# Altium PCB PCB - LAYOUT.PcbDoc
Units mm, origin at the board's own origin, x right, y up, seen from the top; angles counter-clockwise.
Board outline 61.25 x 57.25 mm, 2 copper layers (Top Layer(SNG), Bottom Layer(SNG)), stack 1.135 mm thick; 67 components, 44 nets, 237 pads, 203 vias.
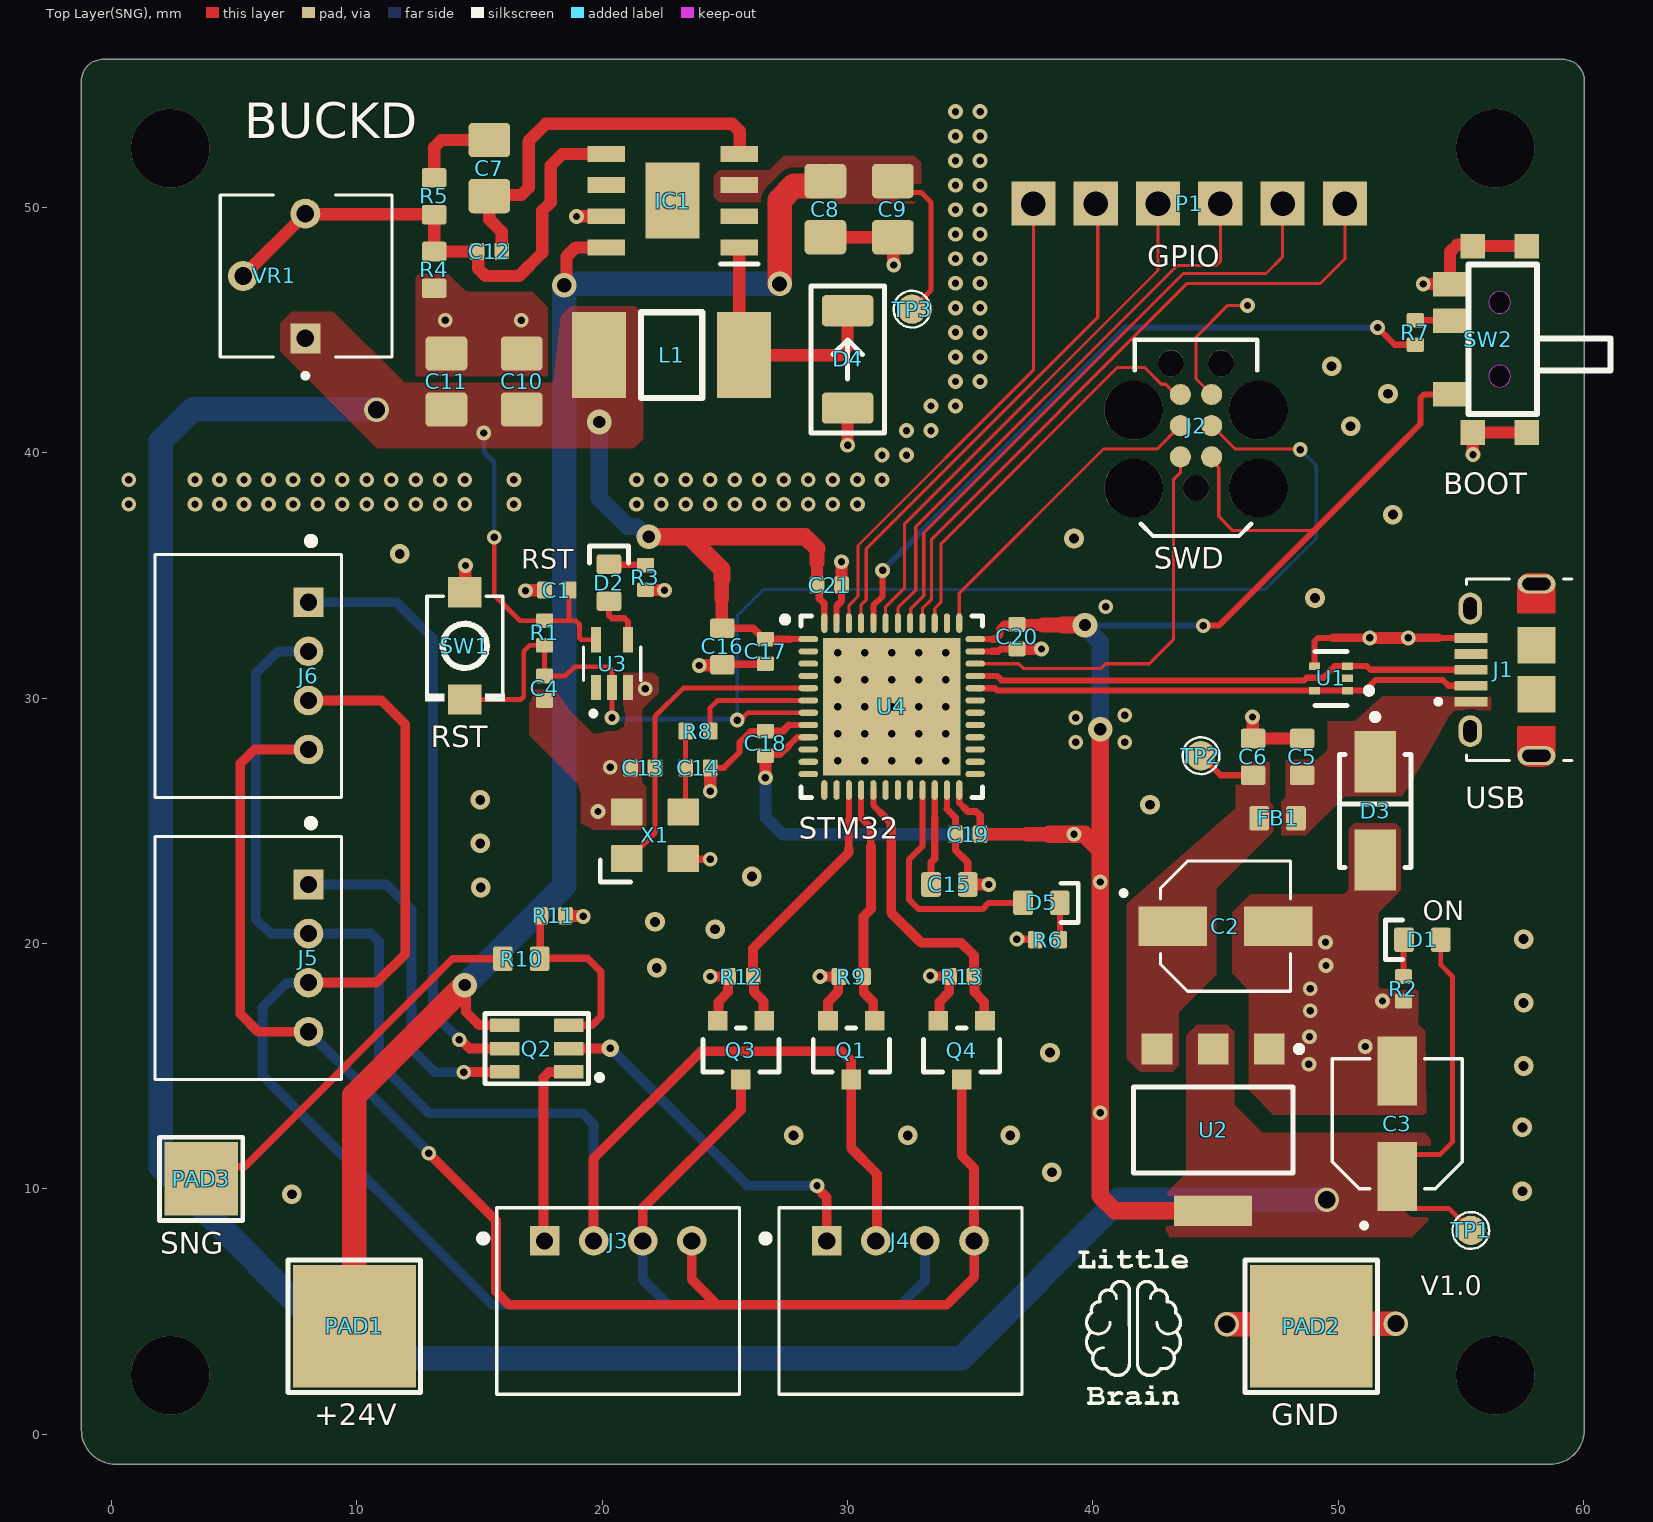
[diagram p0: Top Layer(SNG) view]
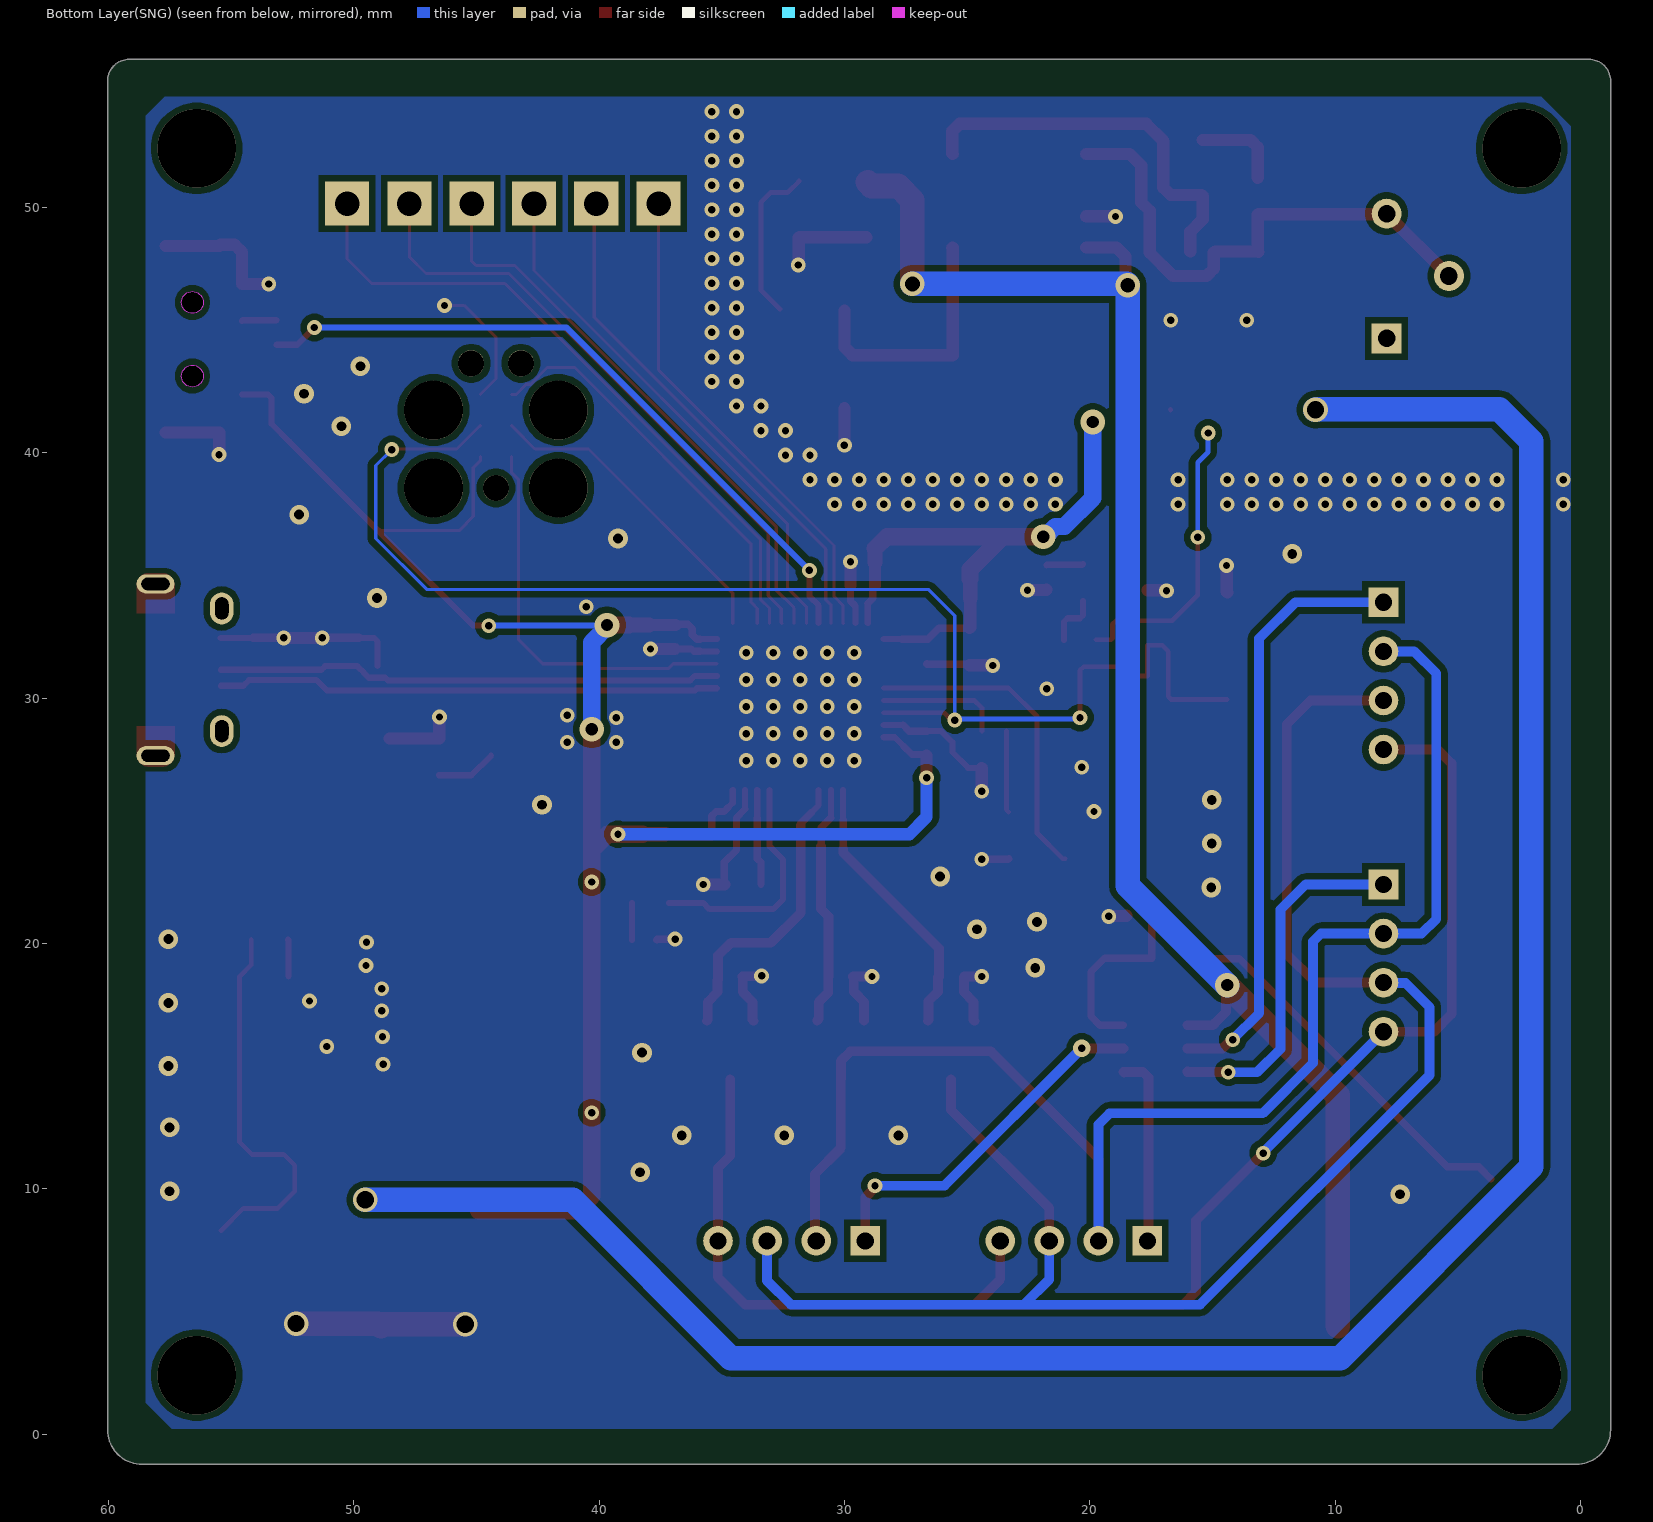
[diagram p1: Bottom Layer(SNG) view, seen from below]
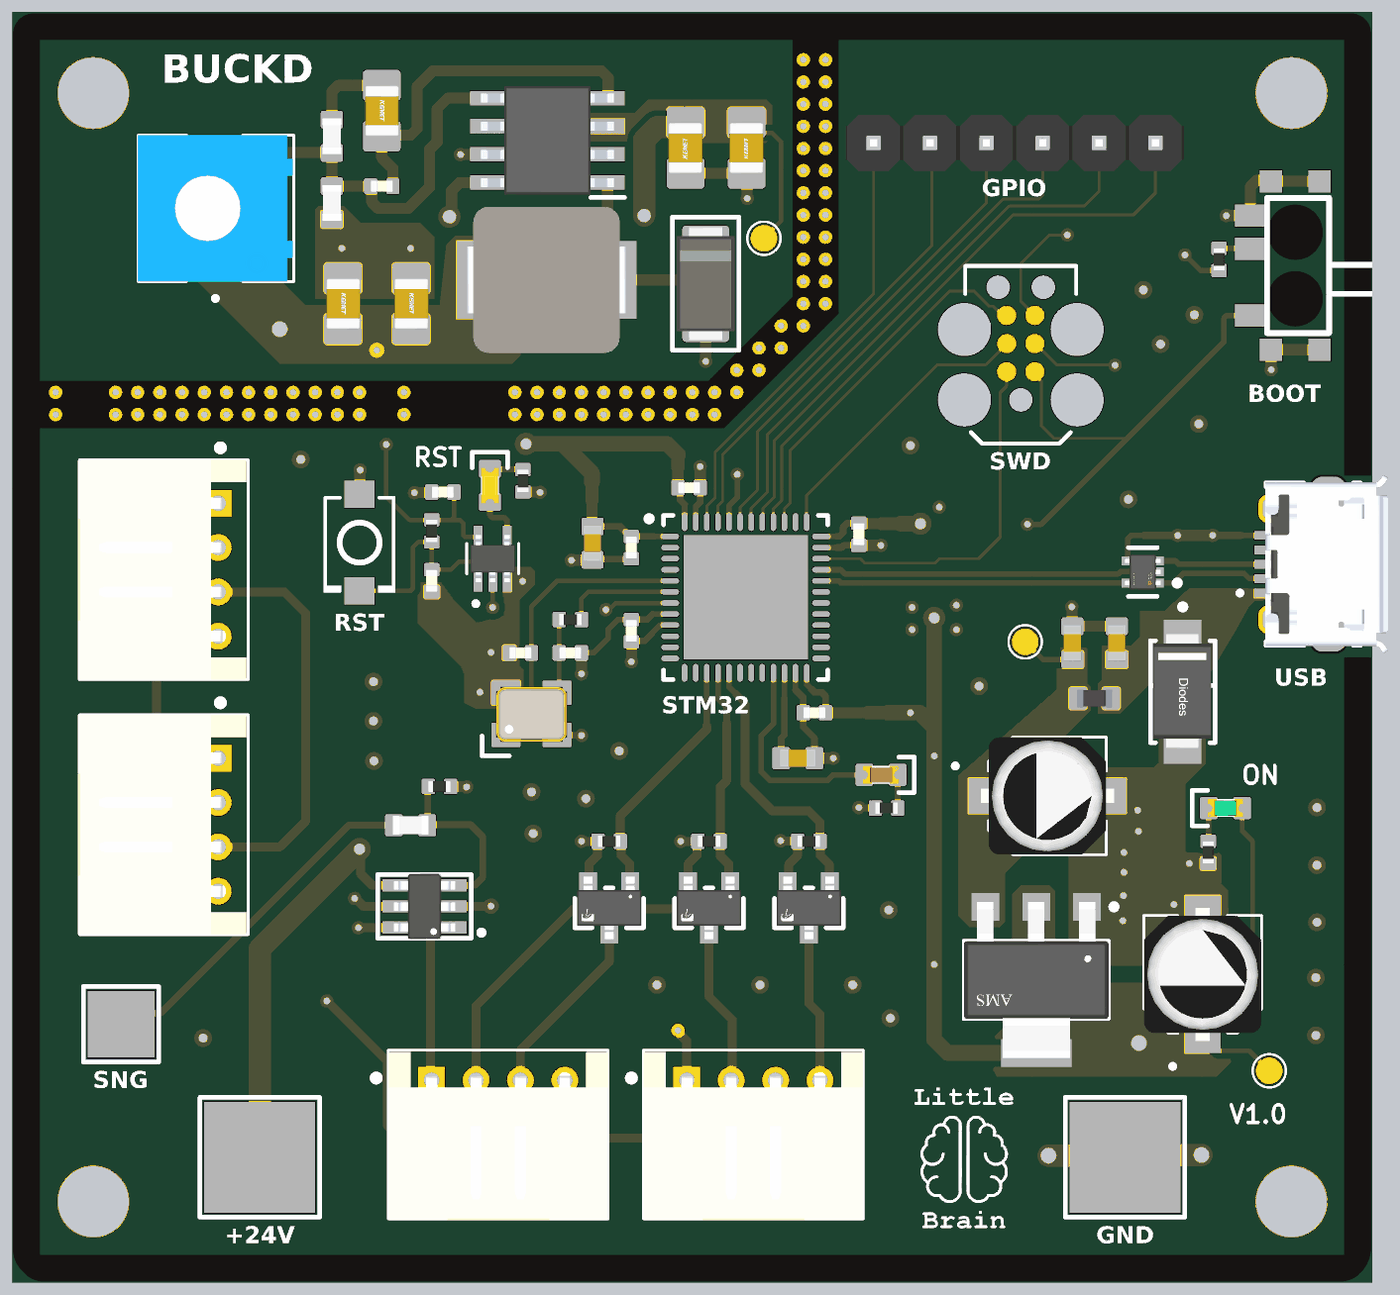
[diagram p2: 3D render of the assembled board from above, using the file's embedded part models]

## Layer stack, top to bottom
Top Solder: solder mask 0.0254, SM-001, Dk 4
Top Layer(SNG): signal copper 0.035
Dielectric 3: core 1.065, Core-039, Dk 4.6
Bottom Layer(SNG): signal copper 0.035
Bottom Solder: solder mask 0.0254, SM-001, Dk 4

## Board outline
-1.227,0.17 ccw(c0.17,0.17) 0.17,-1.227 58.63,-1.227 ccw(c58.63,0.17) 60.027,0.17 60.027,0.9 60.027,55.148 60.027,55.15 ccw(c59.15,55.15) 59.15,56.027 -0.35,56.027 ccw(c-0.35,55.15) -1.227,55.15

## Design rules (kind name [scope] priority, off if disabled: settings)
Clearance [All] p1: gap=0.254 ignorepadtopadclearanceinfootprint=TRUE except(0.127: Arc-Arc Arc-Track Track-Track SMDPad-SMDPad; 0.15: Arc-Text Track-Text SMDPad-Text THPad-Text Via-Text Fill-Text Poly-Text Region-Text Text-Text Text-Hole; 0.2: Arc-SMDPad Track-SMDPad SMDPad-THPad SMDPad-Via SMDPad-Hole THPad-THPad THPad-Via THPad-Hole Via-Hole Fill-Hole Poly-Hole Region-Hole)
ComponentClearance [All] p1 off: gap=0 collisioncheckmode=3 verticalgap=0 showdistances=FALSE
DiffPairsRouting [All] p1: maxlimit=0.166 minlimit=0.104 mostfreqgap=0.104 toplayer_minwidth=0.25 toplayer_maxwidth=0.25 toplayer_prefwidth=0.25 bottomlayer_minwidth=0.25 bottomlayer_maxwidth=0.25 bottomlayer_prefwidth=0.25 impedanceprofiledriven=TRUE impedanceprofileid={7AE4ADFC-DCCD-4F55-A5AE-ACC5054D2491} impedanceprofilevalue=90.000000 maxuncoupledlength=12.7
Height [All] p1 off: minheight=0 maxheight=25.4 prefheight=12.7
HoleSize [All] p1: absolutevalues=TRUE maxlimit=5 minlimit=0.3 maxpercent=80.000 minpercent=20.000
MinimumSolderMaskSliver [All] p1: minsoldermaskwidth=0.1
PlaneClearance [All] p1 off: clearance=0
PlaneConnect [All] p1 off: planeconnectstyle=Direct reliefexpansion=0.508 reliefentries=4 reliefconductorwidth=0.254 reliefairgap=0.254
PolygonConnect [All] p1: connectstyle=Direct reliefconductorwidth=0.254 reliefentries=4 polygonreliefangle="45 Angle" airgapwidth=0.254
RoutingVias [All] p1: holewidth=0.3 width=0.6 viastyle="Through Hole" minholewidth=0.3 minwidth=0.4 maxholewidth=0.8 maxwidth=1
SilkToSilkClearance [All] p1: silktosilkclearance=0.15
SilkToSolderMaskClearance [IsPad] p1: minsilkscreentomaskgap=0.15 clearancetoexposedcopper=TRUE
SolderMaskExpansion [All] p1: expansion=0.04 istentingtop=FALSE
UnRoutedNet [All] p1: checkbadconnections=TRUE
Width [All] p1: maxlimit=5 minlimit=0.127 preferedwidth=0.25 bottomlayer_maxwidth=1 minimp=50.000000 maximp=50.000000 favimp=50.000000
20 further rules are at their usual default settings.

## Classes and differential pairs
component class MCU_Led: C1 C2 C3 C4 C5 C6 C7 C8 C9 C10 C11 C12 C13 C14 C15 C16 C17 C18 C19 C20 C21 D1 D2 D3 D4 D5 FB1 IC1 J1 J2 L1 P1 PAD1 PAD2 R1 R2 R3 R4 R5 R6 R7 R8 SW1 SW2 TP1 TP2 TP3 U1 U2 U3 U4 VR1 X1
component class Control_Led: J3 J4 J5 J6 PAD3 Q1 Q2 Q3 Q4 R9 R10 R11 R12 R13
differential pair class DIFF_USB: USB_D
differential pair USB_D: +USB_D_P -USB_D_N

## Components (designator, comment, footprint, x,y, rotation, side; value= is the part's Value field where it differs from the comment)
C1 "100n" CAP_0402 18.15,34.4 r0 top
C2 "22u" CAP_EEE1EA220WR 45.4,20.7 r0 top value="35V 22uF"
C3 "22u" CAP_EEE1EA220WR 52.4,12.65 r90 top value="35V 22uF"
C4 "100n" CAP_0402 17.65,30.4 r90 top
C5 "2.2u" CAP_0603 48.525,27.6 r270 top
C6 "2.2u" CAP_0603 46.525,27.6 r270 top
C7 "40n" CAP_0805 15.4,51.6 r270 top
C8 "100n" CAP_0805 29.095,49.925 r90 top
C9 "10u" CAP_0805 31.845,49.925 r90 top
C10 "10u" CAP_0805 16.72,42.9 r270 top
C11 "10u" CAP_0805 13.65,42.9 r270 top
C12 "10p" CAP_0402 15.4,48.2 r0 top
C13 "15p" CAP_0402 21.65,27.15 r0 top
C14 "15p" CAP_0402 23.9,27.15 r180 top
C15 "4.7u" CAP_0603 34.15,22.4 r180 top
C16 "2.2u" CAP_0603 24.9,32.1 r90 top
C17 "100n" CAP_0402 26.65,31.9 r90 top
C18 "100n" CAP_0402 26.65,28.15 r270 top
C19 "100n" CAP_0402 34.9,24.45 r0 top
C20 "100n" CAP_0402 36.9,32.5 r90 top
C21 "100n" CAP_0402 29.25,34.6 r180 top
D1 "GREEN" LED_0603_GREEN 53.425,20.15 r0 top
D2 "YELLOW" LED_0603_YELLOW 20.275,34.7 r270 top
D3 "SMAJ5.0A" FP-SMA-MFG 51.5,25.4 r270 top
D4 "" "DO-214AC-2 (SMA)" 30,43.8 r90 top
D5 "RED" LED_0603_RED 37.9,21.65 r180 top
FB1 "120R" FB_0603 47.525,25.1 r180 top
IC1 "L7986ATR" SOIC127P600X170-9N 22.868,50.27 r180 top
J1 "USB_2.0" USB_2.0 55.383,31.175 r90 top
J2 "TC2030" TC2030-FP 44.2,41.1 r90 top
J3 "=VALUE" JST_PH_CONN 20.65,7.748 r0 top
J4 "=VALUE" JST_PH_CONN 32.15,7.748 r0 top
J5 "=VALUE" JST_PH_CONN 7.9,19.4 r270 top
J6 "=VALUE" JST_PH_CONN 7.9,30.9 r270 top
L1 "15uH" FXL0630-150-M 22.825,43.975 r0 top
P1 "" "Header 1x6 male" 42.65,50.15 r0 top
PAD1 "+24V" PAD_PWR 9.9,4.4 r0 top
PAD2 "GND" PAD_PWR 48.9,4.4 r180 top
PAD3 "SNG" PAD_SNG 3.65,10.4 r270 top
Q1 "AO3400A" FP-SOT23-MFG 30.15,15.65 r270 top
Q2 "FDC610PZ" FDC610PZ 17.35,15.65 r90 top
Q3 "AO3400A" FP-SOT23-MFG 25.65,15.65 r270 top
Q4 "AO3400A" FP-SOT23-MFG 34.65,15.65 r270 top
R1 "10K" RES_0402 17.65,32.65 r90 top
R2 "1K" RES_0402 52.65,18.15 r90 top
R3 "1K" RES_0402 21.762,34.913 r90 top
R4 "1K1" RES_0603 13.15,47.45 r90 top
R5 "7K5" RES_0603 13.15,50.45 r90 top
R6 "1K" RES_0402 38.15,20.15 r0 top
R7 "10K" RES_0402 53.138,44.897 r270 top
R8 "0R" RES_0402 23.9,28.65 r180 top
R9 "10K" RES_0402 30.15,18.65 r0 top
R10 "50R" RES_0603 16.7,19.375 r0 top
R11 "10K" RES_0402 18,21.125 r180 top
R12 "10K" RES_0402 25.65,18.65 r0 top
R13 "10K" RES_0402 34.65,18.65 r0 top
SW1 "TS-1088-AR02016" TS-1088-AR02016 14.4,32.15 r270 top
SW2 "SK-3296S-01-L1" SW-SMD_3P-P1.50_L2.7-W6.6 56.113,44.622 r90 top
TP1 "Test Point" "Test Point" 55.4,8.3 r0 top
TP2 "Test Point" "Test Point" 44.4,27.65 r90 top
TP3 "Test Point" "Test Point" 32.625,45.85 r90 top
U1 "TPD2E2U06DRLR" FP-DRL0005A-MFG 49.7,30.8 r180 top
U2 "AMS1117-3.3" FP-AMS1117-IPC_C 44.9,12.4 r270 top
U3 "74LVC1G14GW,125" SOT65P212X110-5N 20.4,31.4 r90 top
U4 "STM32F411CEU6" STM-UFQFPN48_L 31.8,29.65 r0 top
VR1 "5K" TRIM_3362P-1-502LF 7.9,47.2 r90 top
X1 "25MHz" XTAL_3225 22.15,24.4 r0 top

## Footprints (in the part's own frame and the unit in brackets; to place one, negate y for a bottom-side part, rotate by r counter-clockwise, add the part's x,y. Pads: shape width x height; smd on the part's side, far side on the other; paste and mask are expansions set on the pad)
CAP_0402 [mm]
  rrect25% 0.6x0.7 smd: 1(-0.5,0) 2(0.5,0)
  body extent -0.5,-0.26 0.5,0.26, height 0.37
CAP_0603 [mm]
  rrect25% 0.8x1 smd: 1(-0.75,0) 2(0.75,0)
  body extent -0.8,-0.4 0.8,0.4, height 0.51
CAP_0805 [mm]
  rrect25% 1.4x1.7 smd: 1(-1.143,0) 2(1.143,0)
  body extent -1.15,-0.76 1.15,0.79, height 1.01
CAP_EEE1EA220WR [mm]
  rect 2.8x1.6 smd: 1(-2.15,0) 2(2.15,0)
  silkscreen extent -4.25,-2.65 2.65,2.65, body extent -3,-2.65 3,2.65, height 5.8
"DO-214AC-2 (SMA)" [mm]
  rrect25% 1.27x2.1 smd: A(-1.985,0) K(1.985,0)
  silkscreen extent -3,-1.5 3,1.5, body extent -2.6,-1.3 2.6,1.3, height 2.42
FB_0603 [mm]
  rrect25% 0.8x1 smd: 1(-0.75,0) 2(0.75,0)
  body extent -0.8,-0.4 0.8,0.4, height 0.81
FDC610PZ [mm]
  rect 0.55x1.2 smd: 1(-0.886,-1.278) 2(0.064,-1.278) 3(1.014,-1.278) 4(1.014,1.322) 5(0.064,1.322) 6(-0.886,1.322)
  silkscreen extent -1.37,-2.62 1.5,2.13, body extent -1.41,-1.35 1.54,1.4, height 1.1
FP-AMS1117-IPC_C [mm]
  rect 1.25x1.25 smd paste+0 mask+0: 1(-3.295,2.29) 2(-3.295,0) 3(-3.295,-2.29)
  rect 1.25x3.182 smd paste+0 mask+0: 4(3.295,0)
  silkscreen extent -3.42,-3.25 1.75,3.63, body extent -3.9,-3.35 3.9,3.35, height 0.25
FP-DRL0005A-MFG [mm]
  rect 0.45x0.3 smd paste-1000 mask-1000: 1(-0.675,0.5) 2(-0.675,0) 3(-0.675,-0.5) 4(0.675,-0.5) 5(0.675,0.5)
  silkscreen extent -1.68,-1.1 0.65,1.1, body extent -1.05,-1.1 1.05,1.1, height 0.25
FP-SMA-MFG [mm]
  rect 2.5x1.7 smd paste+0 mask+0: 1(-2,0) 2(2,0)
  silkscreen extent -3.95,-1.46 2.3,1.46, body extent -3.35,-1.56 3.35,1.56, height 0.25
FP-SOT23-MFG [mm]
  rect 0.8x0.8 smd paste+0 mask+0: 1(-1.2,0.95) 2(-1.2,-0.95) 3(1.2,0)
  silkscreen extent -0.9,-1.55 0.9,1.55, body extent -1.7,-1.78 1.7,1.78, height 0.25
FXL0630-150-M [mm]
  rect 2.2x3.5 smd: 1(-2.95,0) 2(2.95,0)
  silkscreen extent -1.25,-1.75 1.25,1.75, body extent -3.6,-3.3 3.6,3.3, height 2.8
"Header 1x6 male" [mm] "2.54mm"
  rect 1.8x1.8 hole 1: 1(-5.08,0) 2(-2.54,0) 3(0,0) 4(2.54,0) 5(5.08,0) 6(7.62,0)
  body extent -6.35,-1.27 8.89,1.27, height 8.6
JST_PH_CONN [mm]
  rect 1.208x1.208 hole 0.7: 1(-3,0.127)
  round 1.208 hole 0.7: 2(-1,0.127) 3(1,0.127) 4(3,0.127)
  silkscreen extent -5.64,-6.12 4.95,1.48, body extent -4.95,-6.2 4.95,1.4, height 4.8
LED_0603_GREEN [mm]
  rrect25% 0.8x1 smd: A(0.75,0) K(-0.75,0)
  silkscreen extent -1.5,-0.8 -0.8,0.8, body extent -0.8,-0.4 0.8,0.4, height 0.6
LED_0603_RED [mm]
  rrect25% 0.8x1 smd: A(0.75,0) K(-0.75,0)
  silkscreen extent -1.5,-0.8 -0.8,0.8, body extent -0.8,-0.4 0.8,0.4, height 0.6
LED_0603_YELLOW [mm]
  rrect25% 0.8x1 smd: A(0.75,0) K(-0.75,0)
  silkscreen extent -1.5,-0.8 -0.8,0.8, body extent -0.8,-0.4 0.8,0.4, height 0.6
PAD_PWR [mm]
  rect 5x5 smd: 1(0,0)
  silkscreen extent -2.7,-2.7 2.7,2.7, body extent -2.5,-2.5 2.5,2.5, height 0.03
PAD_SNG [mm]
  rect 3x3 smd: 1(0,0)
  silkscreen extent -1.7,-1.7 1.7,1.7, body extent -1.5,-1.5 1.5,1.5, height 0.03
RES_0402 [mm]
  rrect25% 0.6x0.7 smd: 1(-0.5,0) 2(0.5,0)
  body extent -0.5,-0.25 0.5,0.25, height 0.3
RES_0603 [mm]
  rrect25% 0.8x1 smd: 1(-0.75,0) 2(0.75,0)
  body extent -0.8,-0.43 0.8,0.43, height 0.52
SOIC127P600X170-9N [mm]
  rect 1.525x0.65 smd: 1(-2.712,1.905) 2(-2.712,0.635) 3(-2.712,-0.635) 4(-2.712,-1.905) 5(2.712,-1.905) 6(2.712,-0.635) 7(2.712,0.635) 8(2.712,1.905)
  rect 2.2x3.1 smd: 9(0,0)
  silkscreen extent -3.47,2.58 -1.95,2.58, body extent -3,-2.45 3,2.45, height 1.7
SOT65P212X110-5N [mm]
  rect 1.02x0.4 smd: 1(-0.975,0.65) 2(-0.975,0) 3(-0.975,-0.65) 4(0.975,-0.65) 5(0.975,0.65)
  silkscreen extent -2.13,-1.17 0.68,1.17, body extent -1.06,-1 1.06,1, height 1.1
STM-UFQFPN48_L [mm] "QFN, 48-Leads, Body 7.1x7.1mm, Pitch 0.5mm, Thermal Pad 5.6x5.6mm, IPC High Density"
  oval 0.8x0.25 smd: 1(-3.4,2.75) 2(-3.4,2.25) 3(-3.4,1.75) 4(-3.4,1.25) 5(-3.4,0.75) 6(-3.4,0.25) 7(-3.4,-0.25) 8(-3.4,-0.75) 9(-3.4,-1.25) 10(-3.4,-1.75) 11(-3.4,-2.25) 12(-3.4,-2.75) 25(3.4,-2.75) 26(3.4,-2.25) 27(3.4,-1.75) 28(3.4,-1.25) 29(3.4,-0.75) 30(3.4,-0.25) 31(3.4,0.25) 32(3.4,0.75) 33(3.4,1.25) 34(3.4,1.75) 35(3.4,2.25) 36(3.4,2.75)
  oval 0.25x0.8 smd: 13(-2.75,-3.4) 14(-2.25,-3.4) 15(-1.75,-3.4) 16(-1.25,-3.4) 17(-0.75,-3.4) 18(-0.25,-3.4) 19(0.25,-3.4) 20(0.75,-3.4) 21(1.25,-3.4) 22(1.75,-3.4) 23(2.25,-3.4) 24(2.75,-3.4) 37(2.75,3.4) 38(2.25,3.4) 39(1.75,3.4) 40(1.25,3.4) 41(0.75,3.4) 42(0.25,3.4) 43(-0.25,3.4) 44(-0.75,3.4) 45(-1.25,3.4) 46(-1.75,3.4) 47(-2.25,3.4) 48(-2.75,3.4)
  rect 5.6x5.6 smd: 49(0,0)
  silkscreen extent -4.47,-3.7 3.7,3.7, body extent -3.55,-3.55 3.55,3.55, height 0.6
SW-SMD_3P-P1.50_L2.7-W6.6 [mm]
  rect 1x1 smd paste+0 mask+0.051: 0(-3.8,-1.559) 0(-3.8,0.641) 0(3.8,-1.559) 0(3.8,0.641)
  rect 1x1.4 smd paste+0 mask+0.051: 1(-2.25,1.559) 2(0.75,1.559) 3(2.25,1.559)
  Keep-Out Layer board cut-out: 1.95,-0.459 1.888,-0.236 1.724,-0.073 1.5,-0.014 1.277,-0.073 1.112,-0.236 1.05,-0.459 1.05,-0.459 1.112,-0.682 1.277,-0.845 1.5,-0.904 1.724,-0.845 1.888,-0.682 1.95,-0.459
  Keep-Out Layer board cut-out: -1.05,-0.459 -1.112,-0.236 -1.276,-0.073 -1.5,-0.014 -1.723,-0.073 -1.888,-0.236 -1.95,-0.459 -1.95,-0.459 -1.888,-0.682 -1.723,-0.845 -1.5,-0.904 -1.276,-0.845 -1.112,-0.682 -1.05,-0.459
  silkscreen extent -3.05,-4.98 3.05,0.81
TC2030-FP [mil]
  round 33.98 smd paste-17.01: 1(-50,-25) 2(-50,25) 3(0,-25) 4(0,25) 5(50,-25) 6(50,25)
  round 94.49 hole 94.49 unplated: MH(-100,-100) MH(-100,100) MH(25,100) MH(25,-100)
  round 42.01 hole 42.01 unplated: MH(-100,0) MH(100,-40) MH(100,40)
  silkscreen extent -177,-98 138,98
"Test Point" [mm] "Test Point"
  round 1.2 smd paste-0.6: 1(0,0)
  silkscreen extent -0.75,-0.75 0.75,0.75, body extent -0.6,-0.6 0.6,0.6, height 0.03
TRIM_3362P-1-502LF [mm]
  rect 1.222x1.222 / inner round 1.222 / far side rect 1.222x1.222 hole 0.714: 1(-2.54,0)
  round 1.222 hole 0.714: 2(0,2.54) 3(2.54,0)
  silkscreen extent -4.16,-3.53 3.3,3.47, body extent -3.3,-3.49 3.3,3.49, height 4.88
TS-1088-AR02016 [mm]
  rect 1.23x1.36 smd: 1(-2.159,0) 2(2.211,0)
  silkscreen extent -2,-1.62 2.28,1.62
USB_2.0 [mm]
  rect 0.4x1.35 smd: 1(-1.325,-0.017) 2(-0.675,-0.017) 3(-0.025,-0.017) 4(0.625,-0.017) 5(1.275,-0.017)
  oval 0.775x1.55 hole 0.5 slot 1.15 at 90 deg mask+0: SH1(-3.525,-2.692) SH4(3.475,-2.692)
  rect 1.5x1.55 smd: SH2(0.975,-2.692) SH3(-1.025,-2.692)
  oval 1.3x0.95 hole 0.55 slot 0.9 at 0 deg: SH5(-2.525,0.008) SH6(2.475,0.008)
  Top Layer(SNG) region: -2.325,-3.467 -3.47,-3.467 -3.496,-3.466 -3.522,-3.464 -3.548,-3.461 -3.574,-3.456 -3.599,-3.45 -3.625,-3.443 -3.649,-3.434 -3.673,-3.424 -3.697,-3.413 -3.72,-3.4 -3.742,-3.386 -3.764,-3.372 -3.785,-3.356 -3.805,-3.339 -3.824,-3.321 -3.842,-3.302 -3.859,-3.282 -3.875,-3.261 -3.889,-3.239 -3.903,-3.217 -3.916,-3.194 -3.927,-3.17 -3.937,-3.146 -3.946,-3.122 -3.953,-3.096 -3.959,-3.071 -3.964,-3.045 -3.967,-3.019 -3.969,-2.993 -3.97,-2.967 -3.97,-2.417 -3.969,-2.391 -3.967,-2.365 -3.964,-2.339 -3.959,-2.313 -3.953,-2.288 -3.946,-2.262 -3.937,-2.238 -3.927,-2.214 -3.916,-2.19 -3.903,-2.167 -3.889,-2.145 -3.875,-2.123 -3.859,-2.102 -3.842,-2.082 -3.824,-2.063 -3.805,-2.045 -3.785,-2.028 -3.764,-2.012 -3.742,-1.998 -3.72,-1.984 -3.697,-1.971 -3.673,-1.96 -3.649,-1.95 -3.625,-1.941 -3.599,-1.934 -3.574,-1.928 -3.548,-1.923 -3.522,-1.92 -3.496,-1.918 -3.47,-1.917 -2.325,-1.917
  Top Layer(SNG) region: 3.446,-1.918 3.472,-1.92 3.498,-1.923 3.524,-1.928 3.549,-1.934 3.575,-1.941 3.599,-1.95 3.623,-1.96 3.647,-1.971 3.67,-1.984 3.692,-1.998 3.714,-2.012 3.735,-2.028 3.755,-2.045 3.774,-2.063 3.792,-2.082 3.809,-2.102 3.825,-2.123 3.839,-2.145 3.853,-2.167 3.866,-2.19 3.877,-2.214 3.887,-2.238 3.896,-2.262 3.903,-2.288 3.909,-2.313 3.914,-2.339 3.917,-2.365 3.919,-2.391 3.92,-2.417 3.92,-2.967 3.919,-2.993 3.917,-3.019 3.914,-3.045 3.909,-3.071 3.903,-3.096 3.896,-3.122 3.887,-3.146 3.877,-3.17 3.866,-3.194 3.853,-3.217 3.839,-3.239 3.825,-3.261 3.809,-3.282 3.792,-3.302 3.774,-3.321 3.755,-3.339 3.735,-3.356 3.714,-3.372 3.692,-3.386 3.67,-3.4 3.647,-3.413 3.623,-3.424 3.599,-3.434 3.575,-3.443 3.549,-3.45 3.524,-3.456 3.498,-3.461 3.472,-3.464 3.446,-3.466 3.42,-3.467 2.275,-3.467 2.275,-1.917 3.42,-1.917
  silkscreen extent -3.73,-4.14 3.67,1.41, body extent -4.05,-5.37 4,0.16, height 2.67
XTAL_3225 [mm]
  rrect10% 1.3x1.1 smd: 1(-1.15,-0.95) 2(1.15,-0.95) 3(1.15,0.95) 4(-1.15,0.95)
  silkscreen extent -2.23,-1.89 -1,-1, body extent -1.6,-1.28 1.6,1.22, height 0.61

## Part data
C1 C4 C17 C18 C19 C20 C21: library part CAP_0402, "Capacitor SMD 0402 [C1525]"
C2 C3: library part EEE1EA220WR, "Cap Aluminum Lytic 22uF [C2887274]", Package="RADIAL-2 Panasonic", Check_prices=https://www.snapeda.com/parts/EEE1EA220WR/Panasonic/view-part/?ref=eda, Digi-Key_Part_Number=PCE3900TR-ND, MF=Panasonic, MP=C2887274, Purchase-URL=https://pricing.snapeda.com/search/part/EEE1EA220WR/?ref=eda, SnapEDA_Link=https://www.snapeda.com/parts/EEE1EA220WR/Panasonic/view-part/?ref=snap
C5 C6 C16: library part CAP_0603, "Capacitor SMD 0603 [C23630]"
C7: library part CAP_0805, "Capacitor SMD 0805 [C502151]"
C8: library part CAP_0805, "Capacitor SMD [C49678]"
C9 C10 C11: library part CAP_0805, "Capacitor SMD [C440198]"
C12: library part CAP_0402, "Capacitor SMD 0402 [C32949]"
C13 C14: library part CAP_0402, "Capacitor SMD 0402 [C1548]"
C15: library part CAP_0603, "Capacitor SMD 0603 [C19666]"
D1: library part LED_0603_GREEN, "LED 0603 GREEN SMD[C2986059]"
D2: library part LED_0603_YELLOW, "LED 0603 YELLOW SMD[C72038]"
D3: library part CMP-12828-000007-1, "TVS DIODE 5V 9.2V SMA[C2925443]", Breakdown Voltage=6.4V, Clamping Voltage=9.2V, Manufacturer="Diodes Inc.", Manufacturer Part Number=SMAJ5.0A-13-F, Max Junction Temp=+150°C, Package=SMA, Peak Pulse Current=43.5A, Peak Pulse Power=400W, Reverse Standoff Voltage=5V, Temperature="-55°C to +150°C", Temperature Range Low=-55°C, Automotive=No, Category=Diode, ComponentLink2Description=Datasheet, ComponentLink2URL=https://www.diodes.com/assets/Datasheets/ds19005.pdf, Device Class L1="Circuit Protection", Device Class L2="TVS Diodes", Device Class L3=unset, Digikey Description="TVS DIODE 5V 9.2V SMA", Direction=Unidirectional, Footprint Url=https://www.diodes.com/assets/Package-Files/SMA.pdf, Height=2.4mm, Lead Free=Yes, Mouser Description="TVS DIODE 5V 9.2V SMA", Number Of Channels=1, Octopart=https://octopart.com/smaj5.0a-13-f-diodes+inc.-350158, RoHS=TRUE, Standoff Height=0.05mm, Temperature Range High=+150°C
D4: library part D_SCHOTTKY_SMA, "Diode Schottky SMD SMA (DO-214AA)[C8678]"
D5: library part LED_0603_RED, "LED 0603 RED SMD[C2926776]"
FB1: library part FB_0603, "Ferrite Bead SMD 0603[C14709]"
IC1: "Integrated Circuit", Manufacturer_Name=STMicroelectronics, Mouser Part Number=511-L7986ATR, Arrow Part Number=L7986ATR, Arrow Price/Stock=https://www.arrow.com/en/products/l7986atr/stmicroelectronics?region=nac, Datasheet Link=https://www.st.com/resource/en/datasheet/l7986.pdf, Height=1.7mm, Manufacturer_Part_Number=L7986ATR, Mouser Price/Stock=https://www.mouser.co.uk/ProductDetail/STMicroelectronics/L7986ATR?qs=T%2FOtf55vL7eudqXxvIAS9A%3D%3D
J1: "[C132563]"
J2: "Tag-Connect No-Solder SWD Debug Connector DO NOT PLACE", Manufacturer=Tag-Connect, Manufacturer Part Number=TC2030
J3 J4 J5 J6: library part JST_PH_CONN
L1: library part FXL0630-150-M, "Power Inductor SMD [C177243]", Manufacturer="cjiang (Changjiang Microelectronics Tech)", Manufacturer Part Number=FXL0630-150-M
P1: library part "Header 1x6", "[C37208]"
PAD1 PAD2: library part PAD_PWR
PAD3: library part PAD_SNG
Q1 Q3 Q4: library part CMP-83955-000006-1, "MOSFET N-CH 30V 5.7A SOT23 / [C20917]", Case/Package=SOT-23, Continuous Drain Current (ID)=5.7A, Drain to Source Voltage (Vdss)=30V, Gate to Source Voltage (Vgs)=12V, Input Capacitance=630pF, Max Operating Temperature=150°C, Max Power Dissipation=1.4W, Min Operating Temperature=-55°C, Lead Free="Lead Free", Mount="Surface Mount", Number of Elements=1, Number of Pins=3, Packaging="Tape and Reel", Power Dissipation=1.4W, Radiation Hardening=No, Rds On Max=26.5mR
R1 R7 R9 R11 R12 R13: library part RES_0402, "Resistor SMD 0402 [C25744]"
R2 R3 R6: library part RES_0402, "Resistor SMD 0402 [C11702]"
R4: library part RES_0603, "Resistor SMD 0603[C22764]"
R5: library part RES_0603, "Resistor SMD 0603[C23234]"
R8: library part RES_0402, "Resistor SMD 0402 [C17168]"
R10: library part RES_0603, "Resistor SMD 0603[C849792]"
SW1: Actuator/Cap Color=Black, Contact Current=50mA, Insulation Resistance=100MΩ, JLCPCB Part Class="Extended Part", LCSC Part Name="4*3*2mm 立贴 轻触开关", Manufacturer=XUNPU(讯普), Operating Force=160gf, Operating Temperature=-30℃~+80℃, Voltage Rating (DC)=12V, Actuator Style="Round Button", Add into BOM=yes, Circuit=SPST, Convert to PCB=yes, Datasheet=https://atta.szlcsc.com/upload/public/pdf/source/20200810/C720475_60D09DD6C54279ADDB2DC25100F1CC11.pdf, Device=TS-1088-AR02016, Manufacturer Part=TS-1088-AR02016, Mechanical Life=10万次, Mounting Style="Brick nogging", Pin Style=SMDSplicing, Strike Gundam=不带, Supplier=LCSC, Supplier Footprint=SMD, Supplier Part=C720477, Switch Height=2mm, Switch Length=4mm, Switch Width=3mm, Symbol=TS-1088-AR02016
SW2: Actuator Color=Black, Current Rating (AC)=50mA, JLCPCB Part Class="Extended Part", LCSC Part Name="柄长1.5mm 卧贴双档 滑动开关", Manufacturer="XKB Connectivity(中国星坤)", Operating Temperature=-40℃~+85℃, Voltage Rating (AC)=12V, Actuator Style="Rectangular columnar", Add into BOM=yes, Circuit=SPDT, Convert to PCB=yes, Current Rating (DC)=50mA, Datasheet=https://atta.szlcsc.com/upload/public/pdf/source/20211011/33977E7F5E3AE40A3E3DC6795807E20F.pdf, Device=SK-3296S-01-L1, Manufacturer Part=SK-3296S-01-L1, Mechanical Life=1万次, Mounting Style=卧贴, Pin Style=SMDSplicing, Supplier=LCSC, Supplier Footprint=SMD, Supplier Part=C319020, Switch Height=1.35mm, Switch Length=7.8mm, Switch Width=2.75mm, Symbol=SK-3296S-01-L1, Voltage Rating (DC)=12V
U1: library part CMP-04985-000005-1, "TVS DIODE 5.5V 12.4V SOT5[C1855726]", Ambient Temperature Range High=+125°C, Ambient Temperature Range Low=-40°C, Breakdown Voltage=6.5V, Clamping Voltage=9.7V, Manufacturer="Texas Instruments", Package=DRL0005A, Peak Pulse Current=5.5A, Peak Pulse Power=85W, Reverse Standoff Voltage=5.5V, Temperature="-40°C to +125°C", Automotive=No, Category=IC, ComponentLink2Description=Datasheet, ComponentLink2URL=http://www.ti.com/lit/ds/symlink/tpd2e2u06.pdf, Device Class L1="Circuit Protection", Device Class L2="ESD and Circuit Protection ICs", Device Class L3=unset, Digikey Description="TVS DIODE 5.5V 12.4V SOT5", Direction=Unidirectional, Footprint Url=http://www.ti.com/lit/ds/symlink/sn74ahct1g08.pdf, Height=0.6mm, Interface=USB,Ethernet,LVDS,Other, Ipc Land Pattern Name=SOTFL50P160X55-6, Lead Free=Yes, Manufacturer Part Number=TPD2E2U06DRLR, Mouser Description="ESD Suppressors Dual-Ch High-Speed ESD Protection", Number Of Channels=2, Octopart=https://octopart.com/tpd2e2u06drlr-texas+instruments-47095345, RoHS=TRUE, Standoff Height=0mm, Temperature Range High=+125°C, Temperature Range Low=-40°C
U2: library part CMP-209535-000001-1, "LDO Voltage Regulators 1A, 3.3V [C6186]", Dropout Voltage=1.1V, Manufacturer="Advanced Monolithic Systems", Max Junction Temp=+125°C, Max Power Dissipation=1.2W, Max Supply Voltage=15V, Nominal Supply Current=5mA, Output Current=1A, Output Voltage=3.3V, Package=AMS1117, Temperature="-40°C to +125°C", Temperature Range Low=-40°C, Automotive=No, Category=IC, ComponentLink2Description=Datasheet, ComponentLink2URL=http://www.advanced-monolithic.com/pdf/ds1117.pdf, Device Class L1="Integrated Circuits (ICs)", Device Class L2="Power Management ICs", Device Class L3="Voltage Regulators - Linear", Height=1.8mm, Ipc Land Pattern Name=SOT229P700X180-4, Lead Free=Yes, Manufacturer Part Number=AMS1117-3.3, Number Of Outputs=1, Octopart=https://octopart.com/ams1117-3.3-advanced+monolithic+systems-25899300, Output Type=Fixed, RoHS=TRUE, Standoff Height=0.64mm, Temperature Range High=+125°C
U3: "Inverter Schmitt Trigger 1-Element CMOS 5-Pin TSSOP T/R", Package=None, Availability=Unavailable, MP=74LVC1G14GW,125, Price=None
U4: library part CMP-0243-00165-1, "ARM Cortex-M4 32-bit MCU+FPU, 512 KB Flash, 128 KB RAM, 36 I/Os, 48-Pin UFQFPN, -40 to 85 degC, Tray[ / STM32F411CEU6]", I/Os (High Current)=36, Operating Frequency(F) (Processor speed) (MHz)=100, Package Description=UFQFPN48, Package Reference="48-Pin Ultra Thin Fine Pitch Quad Flat No-Lead, 7 x 7 x 0.6 mm Body, 0.5 mm Pitch, Exposed Pad", Supply Voltage(Vcc) min (V)=1.7, ComponentLink1Description="Manufacturer URL", ComponentLink1URL=http://www.st.com/, ComponentLink2Description=Datasheet, ComponentLink2URL=http://www.st.com/st-web-ui/static/active/en/resource/technical/document/datasheet/DM00115249.pdf, Core="ARM Cortex-M4", DatasheetVersion="Rev. 6", FLASH Size (Prog) (kB)=512, Internal RAM Size (kB)=128, Mounting Technology="Surface Mount", Packing=Tray
VR1: library part 3362P-1-502LF, "Trimmer, Cermet, Rest 5 Kilohms, PCB, 1 Turns, Pwr-Rtg 0.5 W, Tol 10%", Package="3362P-1 Bourns Inc.", Check_prices=https://www.snapeda.com/parts/3362P-1-502LF/Bourns/view-part/?ref=eda, MF=Bourns, MP=3362P-1-502LF, SnapEDA_Link=https://www.snapeda.com/parts/3362P-1-502LF/Bourns/view-part/?ref=snap
X1: library part TSX-3225_24.0000MF15X-AC, "Crystal SMD 24MHz 10PPM 7pF 3225 [C9006]", Manufacturer=Epson, Manufacturer Part Number="TSX-3225 24.0000MF15X-AC"

## Via types
v1: diameter 0.6, hole 0.3, Top Layer(SNG) to Bottom Layer(SNG), 106 vias
v2: diameter 0.6, hole 0.3, Top Layer(SNG) to Bottom Layer(SNG), tented both sides, 53 vias
v3: diameter 0.8, hole 0.4, Top Layer(SNG) to Bottom Layer(SNG), tented both sides, 26 vias
v4: diameter 1, hole 0.5, Top Layer(SNG) to Bottom Layer(SNG), tented both sides, 5 vias
v5: diameter 1, hole 0.7, Top Layer(SNG) to Bottom Layer(SNG), tented both sides, 4 vias
v6: diameter 3.2, hole 3.2, Top Layer(SNG) to Bottom Layer(SNG), 4 vias
v7: diameter 0.6, hole 0.3, Top Layer(SNG) to Bottom Layer(SNG), tented top, 2 vias
v8: diameter 1, hole 0.6, Top Layer(SNG) to Bottom Layer(SNG), tented both sides, 2 vias
v9: diameter 0.7, hole 0.3, Top Layer(SNG) to Bottom Layer(SNG), tented both sides, 1 vias

## Nets (pads, with @x,y where several pads share a name; then routed paths per layer and width w, separated by ;. In a path a pad name is that pad's centre, name@x,y a point inside that pad or via, vN(x,y) a via of type N, cw(c..) or ccw(c..) an arc to the next point about the centre after c; other vN are vias at no path point)
24V+: C8.2 C9.2 IC1.3 IC1.8 PAD1.1 Q2.4 TP3.1 | length 72.8
  Top Layer(SNG) w0.2: C9.2 32.308,50.605 32.995,50.605 33.4,50.2 33.4,46.625 TP3.1
  Top Layer(SNG) w0.4: v4(14.4,18.3) 14.45,18.25 14.45,17.2 14.8,16.849 14.986,16.664 Q2.4
  Top Layer(SNG) w0.5: v8(18.45,46.825) 18.546,46.921 18.546,47.996 18.915,48.365 IC1.8
  Top Layer(SNG) w1: PAD1.1 9.9,13.8 v4(14.4,18.3) ; v8(27.225,46.875) 27.225,50.282 27.811,50.868 28.895,50.868 C8.2@29.055,51.028
  Bottom Layer(SNG) w1: v4(14.4,18.3) 18.45,22.35 v8(18.45,46.825) 18.5,46.875 v8(27.225,46.875)
+3V3: C1.2 C3.1 C10.2 C11.2 C16.2 C17.2 C18.2 C19.2 C20.2 C21.2 D1.A J2.1 L1.1 R1.2 SW2.1 TP1.1 U2.2 U2.4 U3.5 U4.1 U4.9 U4.24 U4.36 U4.48 VR1.1 | length 229.4
  Top Layer(SNG) w0.13: J2.1 44.835,39.677 45.125,39.387 45.125,37.4 45.7,36.825 49,36.825
  Top Layer(SNG) w0.2: v2(15.6,36.55) 15.6,34.2 16.65,33.15 R1.2 18.533,33.15 ; C10.2@16.7,41.737 C10.2 ; C1.2 18.65,33.267 18.533,33.15 ; U3.5 19.142,32.375 19.075,32.442 19.075,33 18.925,33.15 18.533,33.15 ; D1.A 54.175,19.125 54.65,18.65 54.65,11.9 54.15,11.4 52.85,11.4 52.4,10.95 C3.1 52.4,9.9 53.1,9.2 54.5,9.2 TP1.1
  Top Layer(SNG) w0.25: 27.575,28.025 27.95,28.4 U4.9 ; 27.65,32.4 U4.1 ; U4.48 29.05,33.85 ; U4.24 34.55,25.725 34.75,25.525 ; U4.36 35.9,32.4 ; v2(44.5,32.95) 45.125,32.95 49,36.825 52.625,40.45 52.629,40.45 53.347,41.168 53.347,42.225 53.493,42.372 SW2.1
  Top Layer(SNG) w0.3: C16.2 26.15,32.85 26.6,32.4 C17.2 27.65,32.4 ; C18.2 26.696,27.696 27.246,27.696 27.575,28.025 ; C21.2@28.846,34.504 28.846,34.054 29.05,33.85 ; 34.75,25.525 34.9,25.375 35.224,25.375 35.4,25.199 C19.2 ; 35.9,32.4 36.024,32.4 36.2,32.576 36.2,32.824 36.376,33 C20.2@36.764,33
  Top Layer(SNG) w0.5: 24.875,34.05 24.875,32.875 C16.2 ; v2@26.658,26.758 C18.2@26.658,27.642 ; C21.2 28.75,35.508 ; C19.2 37.3,24.45 ; C20.2@36.875,32.975 37.95,32.975
  Top Layer(SNG) w0.6: 24.875,34.05 24.875,34.85 ; 28.75,35.508 28.75,36.09 ; 37.3,24.45 38.225,24.45 ; 37.95,32.975 38.775,32.975
  Top Layer(SNG) w0.7: v4(21.9,36.575) 23.55,36.575 ; 24.875,34.85 24.875,35.25 23.55,36.575 ; 28.75,36.09 28.265,36.575 23.55,36.575 ; 38.225,24.45 v2(39.225,24.45) 39.65,24.45 40.3,23.8 ; 38.775,32.975 v4(39.675,32.975) ; v4(40.3,28.725) 40.3,23.8 ; U2.4 40.895,9.105 40.3,9.7 40.3,23.8
  Bottom Layer(SNG) w0.13: v4(39.675,32.975) v4@39.688,32.962 ; v2@44.488,32.962 v2(44.5,32.95)
  Bottom Layer(SNG) w0.2: v1(15.175,40.8) 15.175,40.025 15.6,39.6 v2(15.6,36.55)
  Bottom Layer(SNG) w0.25: v4@39.688,32.962 v2@44.488,32.962
  Bottom Layer(SNG) w0.5: v2(26.65,26.75) 26.65,25.15 27.35,24.45 v2(39.225,24.45)
  Bottom Layer(SNG) w0.7: v4(19.875,41.25) 19.875,38.147 21.026,36.996 21.398,36.996 21.819,36.575 v4(21.9,36.575) ; v4(39.675,32.975) 39.675,32.894 40.3,32.269 v4(40.3,28.725)
  Bottom Layer(SNG) w1: v5(10.8,41.75) 10.775,41.775 3.313,41.775 2,40.462 2,10.9 9.8,3.1 34.625,3.1 41.075,9.55 v5(49.525,9.55)
  other v2: 40.3,13.1 40.3,22.5
+5V: C2.1 C6.2 FB1.2 TP2.1 U2.3 | length 2.5
  Top Layer(SNG) w0.25: TP2.1 45.2,26.85 C6.2
BUCK_COMP: C7.2 C12.2 IC1.4 | length 16.1
  Top Layer(SNG) w0.5: C12.2 15.9,49 15.4,49.5 C7.2 15.443,50.5 16.7,50.5 17,50.8 17,52.7 17.7,53.4 25.307,53.4 25.6,53.107 25.6,52.195 IC1.4
BUCK_COMP_C_IN: C7.1 R5.2 | length 3.6
  Top Layer(SNG) w0.5: R5.2 13.15,52.45 13.443,52.743 C7.1
BUCK_FB: C12.1 IC1.5 R4.2 R5.1 VR1.2 VR1.3 | length 22.1
  Top Layer(SNG) w0.5: VR1.2 VR1.3 7.92,49.72 13.13,49.72 R5.1 R4.2 ; R4.2@13.125,48.175 R4.2 ; IC1.5@20.156,52.17 18.37,52.17 17.9,51.7 17.9,50.2 17.556,49.856 17.556,48.149 16.607,47.2 15.243,47.2 14.95,47.493 14.95,48.15 C12.1 R4.2
BUCK_OUT: D4.K IC1.1 L1.2 | length 10.5
  Top Layer(SNG) w0.5: IC1.1 IC1.1@25.58,48.36 ; IC1.1@25.6,48.34 IC1.1@25.58,48.36 ; D4.K 30,44.3 29.675,43.975 L1.2 25.58,43.975 IC1.1@25.58,48.36
GND: C1.1 C2.2 C3.2 C4.1 C5.1 C6.1 C8.1 C9.1 C10.1 C11.1 C13.1 C14.1 C15.1 C16.1 C17.1 C18.1 C19.1 C20.1 C21.1 D3.2 D4.A IC1.7 J1.5 J2.5 PAD2.1 Q1.2 Q3.2 Q4.2 R2.1 R3.1 R4.1 R6.1 R9.1 R11.1 R12.1 R13.1 SW1.1 SW2.0 SW2.3 U1.4 U2.1 U3.3 U4.8 U4.23 U4.35 U4.47 U4.49 X1.2 X1.4 | length 70.3
  Top Layer(SNG) w0.13: J2.5 44.2,43.005 44.2,44.7 45.5,46 v2(46.3,46)
  Top Layer(SNG) w0.25: C14.1 24.95,27.15 25.6,27.8 25.6,28.2 26.05,28.65 C18.1 ; 27.6,28.9 U4.8 ; U4.47 29.55,33.75 29.6,33.8 ; 34.05,25.475 U4.23 ; U4.35 35.9,31.9 ; U1.4 49.025,32.304 49.171,32.45 49.775,32.45 ; 54.1,32.45 J1.5 J1.5@55.425,32.45
  Top Layer(SNG) w0.3: X1.2 23.325,23.425 v2(24.4,23.425) ; C16.1 24.925,31.375 26.625,31.375 C17.1 ; C18.1 27.35,28.65 27.6,28.9 ; 29.6,33.8 29.75,33.95 C21.1 ; 34.05,25.475 34.4,25.125 C19.1 34.4,23.8 34.9,23.3 C15.1 ; 35.9,31.9 36.129,31.9 36.229,32 C20.1@36.75,32 ; v2(36.9,20.175) 36.912,20.163 37.638,20.163 R6.1
  Top Layer(SNG) w0.35: 49.775,32.45 v2(51.275,32.45) ; v2(52.85,32.45) 54.1,32.45
  Top Layer(SNG) w0.4: v2(24.4,18.65) 25.112,18.65 25.131,18.631 25.131,18.014 24.732,17.616 24.732,16.882 Q3.2 ; v2(28.875,18.65) R9.1 29.615,18.615 29.615,18.03 29.202,17.617 Q1.2@29.202,16.852 ; v2(33.375,18.675) 33.388,18.662 34.138,18.662 R13.1 34.139,18.639 34.139,18.007 33.748,17.616 33.748,16.898 Q4.2
  Top Layer(SNG) w0.5: SW1.1 14.412,34.321 14.412,35.388 v2(14.425,35.4) ; v2(16.875,34.375) 16.888,34.388 17.637,34.388 C1.1 ; R11.1 18.513,21.113 19.212,21.113 v2(19.225,21.1) ; v2(18.95,49.625) 18.955,49.63 20.151,49.63 IC1.7 ; R3.1 21.775,34.4 22.525,34.4 v2(22.538,34.388) ; v2(23.95,31.325) 23.962,31.337 24.888,31.337 C16.1 ; v2(24.4,26.2) C14.1 ; C8.1 C9.1 31.86,48.767 31.86,47.665 v2(31.875,47.65) ; C21.1 v2(29.75,35.55) ; v2(30,40.3) D4.A ; C15.1 v2(35.75,22.4) ; C20.1 v2(37.9,32) ; v2(46.5,29.225) 46.513,29.212 46.513,28.362 C6.1 C5.1 ; v2(51.275,32.45) v2@52.825,32.45 ; v2(53.463,46.872) SW2.3 54.554,48.179 54.847,48.472 55.422,48.472 55.472,48.422 SW2.0@57.672,48.422 ; v2(55.488,39.922) 55.48,39.93 55.48,40.813 55.472,40.821 SW2.0@57.672,40.821
  Top Layer(SNG) w1: v5(45.45,4.475) 48.825,4.475 PAD2.1 49.002,4.502 v5(52.347,4.502)
  other v1: 29.6,27.45 30.7,27.45 31.8,27.45 32.9,27.45 34,27.45 29.6,28.55 30.7,28.55 31.8,28.55 32.9,28.55 34,28.55 29.6,29.65 30.7,29.65 31.8,29.65 32.9,29.65 34,29.65 29.6,30.75 30.7,30.75 31.8,30.75 32.9,30.75 34,30.75 29.6,31.85 30.7,31.85 31.8,31.85 32.9,31.85 34,31.85 0.7,37.9 3.4,37.9 4.4,37.9 5.4,37.9 6.4,37.9 7.4,37.9 8.4,37.9 9.4,37.9 10.4,37.9 11.4,37.9 12.4,37.9 13.4,37.9 14.4,37.9 16.4,37.9 21.4,37.9 22.4,37.9 23.4,37.9 24.4,37.9 25.4,37.9 26.4,37.9 27.4,37.9 28.4,37.9 29.4,37.9 30.4,37.9 0.7,38.9 3.4,38.9 4.4,38.9 5.4,38.9 6.4,38.9 7.4,38.9 8.4,38.9 9.4,38.9 10.4,38.9 11.4,38.9 12.4,38.9 13.4,38.9 14.4,38.9 16.4,38.9 21.4,38.9 22.4,38.9 23.4,38.9 24.4,38.9 25.4,38.9 26.4,38.9 27.4,38.9 28.4,38.9 29.4,38.9 30.4,38.9 31.4,38.9 31.4,39.9 32.4,39.9 32.4,40.9 33.4,40.9 33.4,41.9 34.4,41.9 34.4,42.9 35.4,42.9 34.4,43.9 35.4,43.9 34.4,44.9 35.4,44.9 34.4,45.9 35.4,45.9 34.4,46.9 35.4,46.9 34.4,47.9 35.4,47.9 34.4,48.9 35.4,48.9 34.4,49.9 35.4,49.9 34.4,50.9 35.4,50.9 34.4,51.9 35.4,51.9 34.4,52.9 35.4,52.9 34.4,53.9 35.4,53.9
  other v2: 48.8,15.075 51.1,15.8 48.825,16.2 48.85,17.25 51.8,17.65 48.85,18.15 49.5,19.1 49.475,20.05 19.825,25.375 20.325,27.175 39.3,28.2 41.3,28.2 39.3,29.2 41.3,29.3 21.75,30.375 40.525,33.725 13.6,45.4 16.7,45.4
  other v3: 7.35,9.775 57.5,9.9 38.325,10.675 27.8,12.175 32.45,12.175 36.625,12.175 57.5,12.5 57.55,15 38.25,15.55 57.55,17.575 22.225,19 57.55,20.175 24.6,20.575 22.15,20.875 15.05,22.275 26.1,22.725 15.025,24.075 42.325,25.65 15.025,25.85 49.05,34.075 11.75,35.875 39.225,36.5 52.225,37.475 50.5,41.075 52.025,42.4 49.725,43.525
LED_PWR_K: D1.K R2.2 | length 1.5
  Top Layer(SNG) w0.25: R2.2 52.663,18.662 52.663,20.138 D1.K
LED_STRIP_B: J3.4 J4.4 J5.4 J6.4 Q4.3 | length 61.5
  Top Layer(SNG) w0.4: J5.4 5.975,16.4 5.25,17.125 5.25,27.325 5.825,27.9 J6.4 ; v2(12.925,11.45) 15.664,8.711 15.664,5.811 16.206,5.269 24.688,5.269 ; J3.4@23.646,7.871 23.646,6.311 24.688,5.269 ; Q4.3 34.65,11.35 35.15,10.85 J4.4 ; J4.4@35.164,7.862 35.164,6.395 34.038,5.269 24.688,5.269
  Bottom Layer(SNG) w0.4: J5.4 12.925,11.502 v2(12.925,11.45)
LED_STRIP_B_GATE: Q4.1 R13.2 U4.17 | length 12.2
  Top Layer(SNG) w0.25: U4.17 31.05,25.625 31.35,25.325
  Top Layer(SNG) w0.3: 31.35,25.325 31.775,24.9 31.775,24.8
  Top Layer(SNG) w0.4: 31.775,24.8 31.775,21.25 33,20.025 34.625,20.025 35.15,19.5 R13.2 35.15,18.518 35.168,18.5 35.168,18.013 35.565,17.616 35.565,16.885 Q4.1
LED_STRIP_G: J3.2 J4.2 J5.2 J6.2 Q1.3 | length 61
  Top Layer(SNG) w0.4: J3.2 19.65,11.225 24.025,15.6 29.75,15.6 30.134,15.216 30.134,14.466 Q1.3 30.15,11.65 31.2,10.6 31.2,7.925 J4.2
  Bottom Layer(SNG) w0.4: J6.2 6.775,31.9 5.875,31 5.875,21 6.475,20.4 J5.2 10.575,20.4 10.9,20.075 10.9,15.125 12.95,13.075 19.195,13.075 19.65,12.62 J3.2
LED_STRIP_G_GATE: Q1.1 R9.2 U4.16 | length 9.9
  Top Layer(SNG) w0.25: 30.55,25.125 U4.16
  Top Layer(SNG) w0.3: 30.55,25.125 30.95,24.725 30.95,23.951
  Top Layer(SNG) w0.4: 30.95,23.951 30.95,21.4 30.65,21.1 R9.2 30.657,18.643 30.657,18.003 31.044,17.616 31.044,16.926 Q1.1@31.11,16.86
LED_STRIP_PWR_GATE: Q2.3 R10.2 R11.2 | length 7.7
  Top Layer(SNG) w0.3: R11.2@17.475,21.1 17.475,19.4 19.4,19.4 19.95,18.85 19.95,17.025 19.589,16.664 Q2.3
LED_STRIP_PWR_RES: PAD3.1 R10.1 | length 16
  Top Layer(SNG) w0.3: PAD3.1 4.149,10.899 5.424,10.899 13.9,19.375 R10.1
LED_STRIP_R: J3.3 J4.3 J5.3 J6.3 Q3.3 | length 67.4
  Top Layer(SNG) w0.4: J5.3 10.8,18.4 11.975,19.575 11.975,28.925 11,29.9 J6.3 ; J3.3 21.65,9.216 25.65,13.216 Q3.3
  Bottom Layer(SNG) w0.4: J5.3 8.014,18.387 7.137,18.387 6.15,17.4 6.15,14.625 15.5,5.275 22.675,5.275 ; J3.3 21.65,6.3 22.675,5.275 ; J4.3 33.15,6.25 32.175,5.275 22.675,5.275
LED_STRIP_R_GATE: Q3.1 R12.2 U4.15 | length 11.2
  Top Layer(SNG) w0.25: 30.05,25.05 U4.15
  Top Layer(SNG) w0.3: 30.05,23.85 30.05,25.05
  Top Layer(SNG) w0.4: R12.2@26.147,18.653 26.147,19.793 30.05,23.696 30.05,23.85 ; R12.2 26.184,18.616 26.184,18.029 26.568,17.644 26.568,16.882 Q3.1
MCU_BOOT0: R7.2 U4.44 | length 28.4
  Top Layer(SNG) w0.25: U4.44 31.05,33.775 31.425,34.15 v7(31.425,35.2) ; v2(51.6,45.1) 52.3,44.4 R7.2@53.15,44.4
  Bottom Layer(SNG) w0.25: v7(31.425,35.2) 41.325,45.1 42.8,45.1 v2(51.6,45.1)
MCU_BOOT0_SW: R7.1 SW2.2 | length 1.4
  Top Layer(SNG) w0.25: R7.1 54.529,45.397 SW2.2
MCU_LED_A: D5.A U4.21 | length 9.6
  Top Layer(SNG) w0.25: U4.21 33.05,23.95 32.5,23.4 32.5,21.8 32.9,21.4 35.5,21.4 35.75,21.65 D5.A
MCU_LED_K: D5.K R6.2 | length 1.5
  Top Layer(SNG) w0.25: R6.2 D5.K
MCU_NRST: C4.2 J2.3 R1.1 SW1.2 U3.2 U4.7 | length 56.6
  Top Layer(SNG) w0.13: J2.3 44.85,41.1 45.8,40.15 48.425,40.15 v2(48.45,40.125)
  Top Layer(SNG) w0.2: SW1.2 16.683,29.939 16.8,30.056 16.8,31.9 17.05,32.15 R1.1 C4.2 18.5,30.9 18.875,31.275 20.25,31.275 20.4,31.125 U3.2 v2(20.4,29.2) ; v7(25.5,29.1) 25.635,29.1 25.935,29.4 U4.7
  Bottom Layer(SNG) w0.13: v7(25.5,29.1) 25.5,33.35 26.575,34.425 47.025,34.425 49.1,36.5 49.1,39.475 v2(48.45,40.125)
  Bottom Layer(SNG) w0.2: v2(20.4,29.2) 20.45,29.15 25.45,29.15 v7(25.5,29.1)
MCU_OSC_IN: C13.2 U4.5 X1.1 | length 13.1
  Top Layer(SNG) w0.2: X1.1 21.1,23.45 22.15,24.5 C13.2 22.15,29.25 23.3,30.4 U4.5
MCU_OSC_OUT: R8.1 U4.6 | length 5.1
  Top Layer(SNG) w0.2: R8.1 24.4,29.6 24.7,29.9 U4.6
MCU_SWCLK: J2.4 U4.37 | length 13.1
  Top Layer(SNG) w0.13: U4.37 34.55,34.271 40.428,40.148 42.613,40.148 J2.4
MCU_SWDIO: J2.2 U4.34 | length 16.2
  Top Layer(SNG) w0.13: U4.34 36.975,31.4 37.175,31.2 40.325,31.2 40.525,31.4 42.3,31.4 43.277,32.377 43.277,38.896 43.565,39.184 J2.2
MCU_SWO: J2.6 U4.39 | length 16.5
  Top Layer(SNG) w0.13: U4.39 33.55,33.65 33.8,33.9 33.8,36.275 41,43.475 42.1,43.475 42.788,42.787 42.959,42.787 43.377,42.37 J2.6
MCU_VCAP1: C15.2 U4.22 | length 3.9
  Top Layer(SNG) w0.25: 33.55,25.125 U4.22
  Top Layer(SNG) w0.3: C15.2 33.4,23.3 33.55,23.45 33.55,25.125
PB4_SPARE: P1.6 U4.40 | length 27.4
  Top Layer(SNG) w0.13: U4.40 33.05,33.65 33.425,34.025 33.425,36.475 43.85,46.9 49.275,46.9 50.27,47.895 P1.6
PB5_SPARE: P1.5 U4.41 | length 25.4
  Top Layer(SNG) w0.13: U4.41 32.57,33.07 32.57,33.645 33.1,34.175 33.1,36.725 43.675,47.3 47.05,47.3 47.73,47.98 P1.5
PB6_SPARE: P1.4 U4.42 | length 24.2
  Top Layer(SNG) w0.13: U4.42 32.05,33.675 32.775,34.4 32.775,36.975 43.425,47.625 45,47.625 45.2,47.825 45.2,50.14 P1.4 P1.4@44.681,49.641
PB7_SPARE: P1.3 U4.43 | length 21.7
  Top Layer(SNG) w0.13: U4.43 31.55,33.725 32.325,34.5 32.325,37.1 42.65,47.425 P1.3
PB8_SPARE: P1.2 U4.45 | length 21.1
  Top Layer(SNG) w0.13: U4.45 30.55,33.8 30.759,34.009 30.759,36.079 40.195,45.514 40.195,50.065 P1.2
PB9_SPARE: P1.1 U4.46 | length 20.2
  Top Layer(SNG) w0.13: U4.46 30.062,33.062 30.062,33.788 30.422,34.148 30.422,36.216 37.57,43.364 P1.1
PWR_STRIP_DRAIN_1: J3.1 Q2.1 | length 7.8
  Top Layer(SNG) w0.4: J3.1 17.6,7.925 17.6,14.53 17.834,14.764 Q2.1 Q2.1@18.6,14.736
PWR_STRIP_DRAIN_2: J4.1 Q2.2 | length 14.9
  Top Layer(SNG) w0.4: Q2.2 18.633,15.719 20.319,15.719 v9(20.325,15.725) ; v1(28.75,10.125) 28.75,10.044 29.15,9.644 J4.1
  Bottom Layer(SNG) w0.4: v9(20.325,15.725) 25.925,10.125 v1(28.75,10.125)
PWR_STRIP_DRAIN_3: J5.1 Q2.6 | length 14.5
  Top Layer(SNG) w0.4: v2(14.35,14.75) 14.357,14.757 16.021,14.757 Q2.6 Q2.6@16.017,14.775
  Bottom Layer(SNG) w0.4: J5.1 11.2,22.4 12.225,21.375 12.225,15.7 13.175,14.75 v2(14.35,14.75)
PWR_STRIP_DRAIN_4: J6.1 Q2.5 | length 24.5
  Top Layer(SNG) w0.4: v2(14.175,16.075) 14.229,16.075 14.59,15.714 Q2.5
  Bottom Layer(SNG) w0.4: J6.1 11.625,33.9 13.1,32.425 13.1,17.15 v2(14.175,16.075)
TRIG_LED_A: D2.A U3.4 | length 2.2
  Top Layer(SNG) w0.25: D2.A@20.279,33.946 D2.A 20.275,33.375 20.4,33.25 20.904,33.25 21.05,33.104 U3.4
TRIG_LED_K: D2.K R3.2 | length 1.5
  Top Layer(SNG) w0.25: D2.K 20.294,35.431 21.744,35.431 R3.2
USB_D_N: J1.2 U1.5 U4.32 | length 20.4
  Top Layer(SNG) w0.25: U4.32 U4.32@35.386,30.4 ; U4.32@35.387,30.399 36.001,30.399 36.1,30.3 U1.5 ; U1.5@49.1,30.3 51.075,30.3 51.509,30.734 54.266,30.734 54.497,30.502 55.398,30.502 J1.2
USB_D_P: J1.3 U1.3 U4.33 | length 20.6
  Top Layer(SNG) w0.25: U4.33 35.579,30.9 35.581,30.898 36.091,30.898 36.272,30.716 48.607,30.716 48.715,30.825 49.385,30.825 49.575,31.015 49.575,31.025 49.85,31.3 U1.3 51.162,31.3 51.312,31.15 J1.3
VBUS: C5.2 D3.1 FB1.1 J1.1
XTAL_IN: C14.2 R8.2 X1.3 | length 3.3
  Top Layer(SNG) w0.2: X1.3 23.4,25.45 C14.2 R8.2
pads on no net: IC1.2 IC1.6 IC1.9 J1.4 J1.SH1 J1.SH2 J1.SH3 J1.SH4 J1.SH5 J1.SH6 J2.MH U1.1 U1.2 U3.1 U4.2 U4.3 U4.4 U4.10 U4.11 U4.12 U4.13 U4.14 U4.18 U4.19 U4.20 U4.25 U4.26 U4.27 U4.28 U4.29 U4.30 U4.31 U4.38
copper on no net:
  other v6: 2.4,2.4 56.4,2.4 2.4,52.4 56.4,52.4

## Polygon pours and split planes (outlines as drawn)
+3V3 on Top Layer(SNG) "+3V3_L01_P007" (solid, pour order 7): 21.667,45.658 21.35,45.975 18.7,45.975 18.304,45.579 18.304,45.55 18.01,42.85 11.942,42.85 9.042,45.75 7.35,45.75 6.867,45.267 6.867,44.125 10.807,40.185 21.277,40.185 21.667,40.575
+3V3 on Top Layer(SNG) "+3V3_L01_P003" (solid, remove dead copper, pour order 3): 42.91,8.421 43.133,8.025 53,8.025 53.775,8.8 53.775,12.025 53.525,12.275 46.9,12.275 45.75,13.425 45.75,16.4 45.475,16.675 44.225,16.675 43.8,16.25 43.8,10.625 42.91,9.735
GND on Top Layer(SNG) "GND_L01_P014" (solid, pour order 14): 12.4,43.1 17.775,43.1 17.775,45.925 17.15,46.55 14.45,46.55 13.7,47.3 12.55,47.3 12.4,47.15
GND on Top Layer(SNG) "GND_L01_P012" (solid, pour order 12): 21.625,28.725 21.625,29.546 22.3,30.221 22.3,30.825 22.1,31.025 20.75,31.025 20.75,29.8 20.9,29.65 20.9,28.821 19.827,28.542 19.633,28.542 18.688,29.487 18.055,30.35 17.025,30.35 17.025,28.475 18.975,26.525 19.125,26.15 19.125,24.893 19.646,24.625 21.65,24.625 21.8,24.775 21.8,26.375 21.625,26.55 21.625,27.562
24V+ on Top Layer(SNG) "24V+_L01_P009" (solid, pour order 9): 26.8,51.5 27.4,52.1 32.725,52.1 33,51.825 33,50.45 32.7,50.15 28.175,50.15 24.773,50.202 24.55,50.425 24.55,51.3 24.575,51.3 24.775,51.5
GND on Top Layer(SNG) "GND_L01_P004" (solid, pour order 4): 53.225,16.75 53.25,16.775 53.25,18.025 53.125,18.15 51.7,18.15 51.625,18.225 51.625,21.25 52.55,22.175 52.55,24.675 52.325,24.9 50.65,24.9 50.425,24.675 50.425,22.175 50.4,22.175 50.225,22 46.4,22 45.675,21.275 45.675,18.775 46.35,18.1 46.35,14.025 47.35,13.025 53.5,13.025 53.575,13.1 53.55,16.425
+5V on Top Layer(SNG) "+5V_L01_P002" (solid, pour order 2): 47.225,24.425 45.025,22.225 45.025,18.725 43.5,17.2 43.5,15.025 43.225,14.75 43.2,14.775 41.9,14.775 41.375,15.3 41.375,21.625 45.825,25.5 45.825,26.45 45.8,26.475 45.825,26.5 45.825,27.325 45.9,27.4 47.15,27.4 47.2,27.35 47.2,25.75 47.35,25.6 47.35,24.55
VBUS on Top Layer(SNG) "VBUS_L01_P000" (solid, pour order 0): 51.8,30.075 50.675,29.05 49.575,29.05 49.575,27.9 49.15,27.475 47.85,27.475 47.85,25.95 47.675,25.775 47.675,24.4 48.675,24.4 50.275,26 52.6,26 53.8,28 54.5,29.25 54.75,29.5 56.225,29.5 56.225,29.625 56.225,30.075
GND on Bottom Layer(SNG) "GND_L02_P011" (solid, pour order 11): 1.25,0.227 1.148,0.227 0.4,0.975 0.4,52.269 0.4,53.3 1.596,54.496 2,54.504 57.7,54.504 58.468,53.732 58.468,1.28 57.413,0.225 57.275,0.227
GND on Top Solder "NONET_L01_P-001" (solid): 0,39.425 30.125,39.425 33.925,43.225 33.925,54.8 36,54.8 36,42.45 30.825,37.275 0,37.275

## Silkscreen, mask and mechanical layers (free items; w line width, h text height)
Top Overlay:
  drawing of 15 lines, arcs and shapes, not listed
  text "BUCKD" at 5.41,52.323 h2.5
  text "GPIO" at 42.204,47.3 h1.5
  text "BOOT" at 54.275,38.025 h1.5
  text "RST" at 16.709,35.275 h0.8
  text "SWD" at 42.479,34.975 h1.5
  text "RST" at 13.012,27.7 h1.5
  text "USB" at 55.182,25.225 h1.5
  text "STM32" at 28.01,23.975 h1.5
  text "ON" at 53.45,20.95 h0.8
  text "SNG" at 1.982,7.075 h1.5
  text "V1.0" at 53.35,5.65 h0.8
  text "+24V" at 8.264,0.075 h1.5
  text "GND" at 47.264,0.075 h1.5
Top Solder:
  region: -0.245,55.999 59.061,55.999 59.155,55.999 59.34,55.962 59.513,55.89 59.669,55.786 59.736,55.719 59.796,55.659 59.891,55.517 59.956,55.359 59.983,55.223 59.99,55.106 59.99,35.145 58.796,35.145 58.796,36.796 58.8,54.8 0,54.8 0,0 58.8,0 58.8,26.937 58.802,26.941 59.99,26.941 59.99,26.217 59.99,0.344 59.99,0.182 59.926,-0.137 59.802,-0.437 59.622,-0.706 59.4,-0.928 59.199,-1.063 58.976,-1.155 58.739,-1.202 58.618,-1.202 0.046,-1.202 -0.172,-1.159 -0.377,-1.074 -0.549,-0.959 -0.64,-0.872 -0.786,-0.726 -0.884,-0.628 -1.038,-0.397 -1.145,-0.14 -1.199,0.132 -1.199,0.271 -1.199,55.045 -1.199,55.139 -1.162,55.323 -1.09,55.497 -0.986,55.653 -0.919,55.719 -0.853,55.786 -0.697,55.89 -0.523,55.962 -0.339,55.999
  region: -0.27,55.999 59.036,55.999 59.13,55.999 59.315,55.962 59.488,55.89 59.644,55.786 59.711,55.719 59.771,55.659 59.866,55.517 59.931,55.359 59.958,55.223 59.965,55.106 59.965,35.145 58.771,35.145 58.771,36.796 58.775,54.8 -0.025,54.8 -0.025,0 58.775,0 58.775,26.937 58.777,26.941 59.965,26.941 59.965,26.217 59.965,0.344 59.965,0.182 59.901,-0.137 59.777,-0.437 59.597,-0.706 59.375,-0.928 59.174,-1.063 58.951,-1.155 58.714,-1.202 58.593,-1.202 0.021,-1.202 -0.197,-1.159 -0.402,-1.074 -0.574,-0.959 -0.665,-0.872 -0.811,-0.726 -0.909,-0.628 -1.063,-0.397 -1.17,-0.14 -1.224,0.132 -1.224,0.271 -1.224,55.045 -1.224,55.139 -1.187,55.323 -1.115,55.497 -1.011,55.653 -0.944,55.719 -0.878,55.786 -0.722,55.89 -0.548,55.962 -0.364,55.999
  lines w0.8: 56.572,42.672 ccw(c56.568,43.122) 56.572,43.572 ccw(c56.577,43.122) 56.572,42.672 ; 56.572,45.672 ccw(c56.568,46.122) 56.572,46.572 ccw(c56.577,46.122) 56.572,45.672
  lines w1.6: 56.572,42.672 ccw(c56.568,43.122) 56.572,43.572 ; 56.572,42.672 cw(c56.577,43.122) 56.572,43.572 ; 56.572,42.672 ccw(c56.568,43.122) 56.572,43.572 ; 56.572,42.672 cw(c56.577,43.122) 56.572,43.572 ; 56.572,45.672 ccw(c56.568,46.122) 56.572,46.572 ; 56.572,45.672 cw(c56.577,46.122) 56.572,46.572 ; 56.572,45.672 ccw(c56.568,46.122) 56.572,46.572 ; 56.572,45.672 cw(c56.577,46.122) 56.572,46.572
Bottom Solder:
  region: -0.262,56.01 59.044,56.01 59.138,56.01 59.323,55.973 59.496,55.901 59.652,55.797 59.719,55.73 59.779,55.67 59.874,55.528 59.939,55.37 59.966,55.234 59.973,55.117 59.973,35.156 58.779,35.156 58.779,36.807 58.783,54.811 -0.017,54.811 -0.017,0.011 58.783,0.011 58.783,26.948 58.785,26.952 59.973,26.952 59.973,26.228 59.973,0.355 59.973,0.193 59.909,-0.126 59.785,-0.426 59.605,-0.695 59.383,-0.917 59.182,-1.052 58.959,-1.144 58.722,-1.191 58.601,-1.191 0.029,-1.191 -0.189,-1.148 -0.394,-1.063 -0.566,-0.948 -0.657,-0.861 -0.803,-0.715 -0.901,-0.617 -1.055,-0.386 -1.162,-0.129 -1.216,0.143 -1.216,0.282 -1.216,55.056 -1.216,55.15 -1.179,55.334 -1.107,55.508 -1.003,55.664 -0.936,55.73 -0.87,55.797 -0.714,55.901 -0.54,55.973 -0.356,56.01

## Text inside footprints (layer, text, board x,y; h text height)
D1: Mechanical 13 "+" at 54.742,20.758 h0.5
D2: Mechanical 13 "+" at 20.883,33.383 h0.5 r270
D5: Mechanical 13 "+" at 36.583,21.042 h0.5 r180
J1: Mechanical 13 "PCB EDGE" at 59.325,35.4 h0.81 r90